# Altium PCB BatteryBoardPCB.PcbDoc
Units mil, origin at the board's own origin, x right, y up, seen from the top; angles counter-clockwise.
Board outline 3543.88 x 3543.5 mil, 4 copper layers (Top Layer, GND, VCC, Bottom Layer), stack 68.756 mil thick; 52 components, 28 nets, 198 pads, 48 vias.
Unrouted connection lines stored in the file: 82.
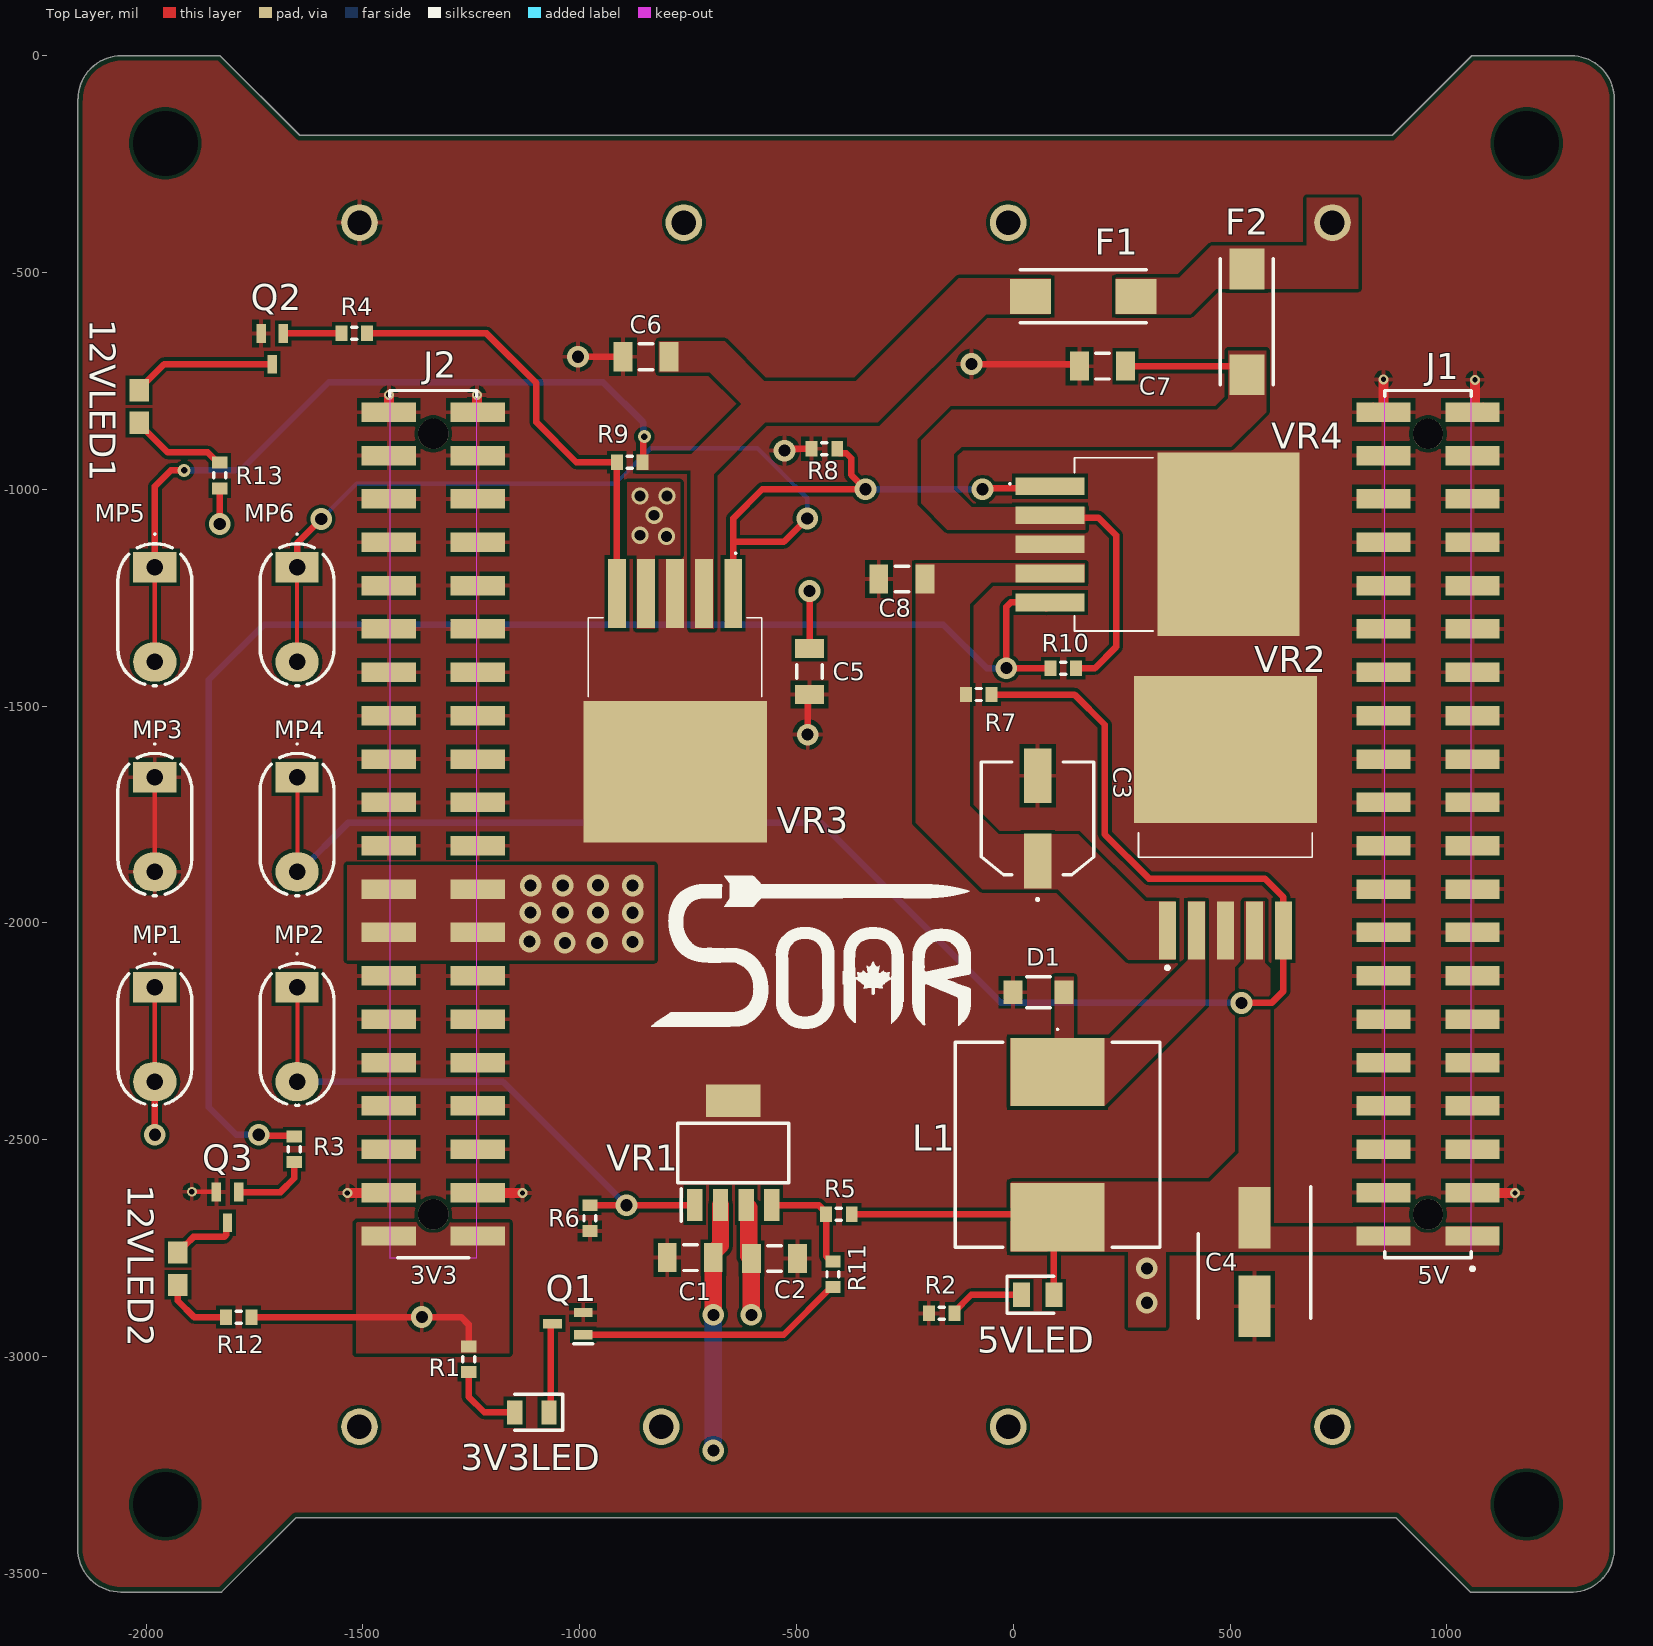
[diagram p0: Top Layer view]
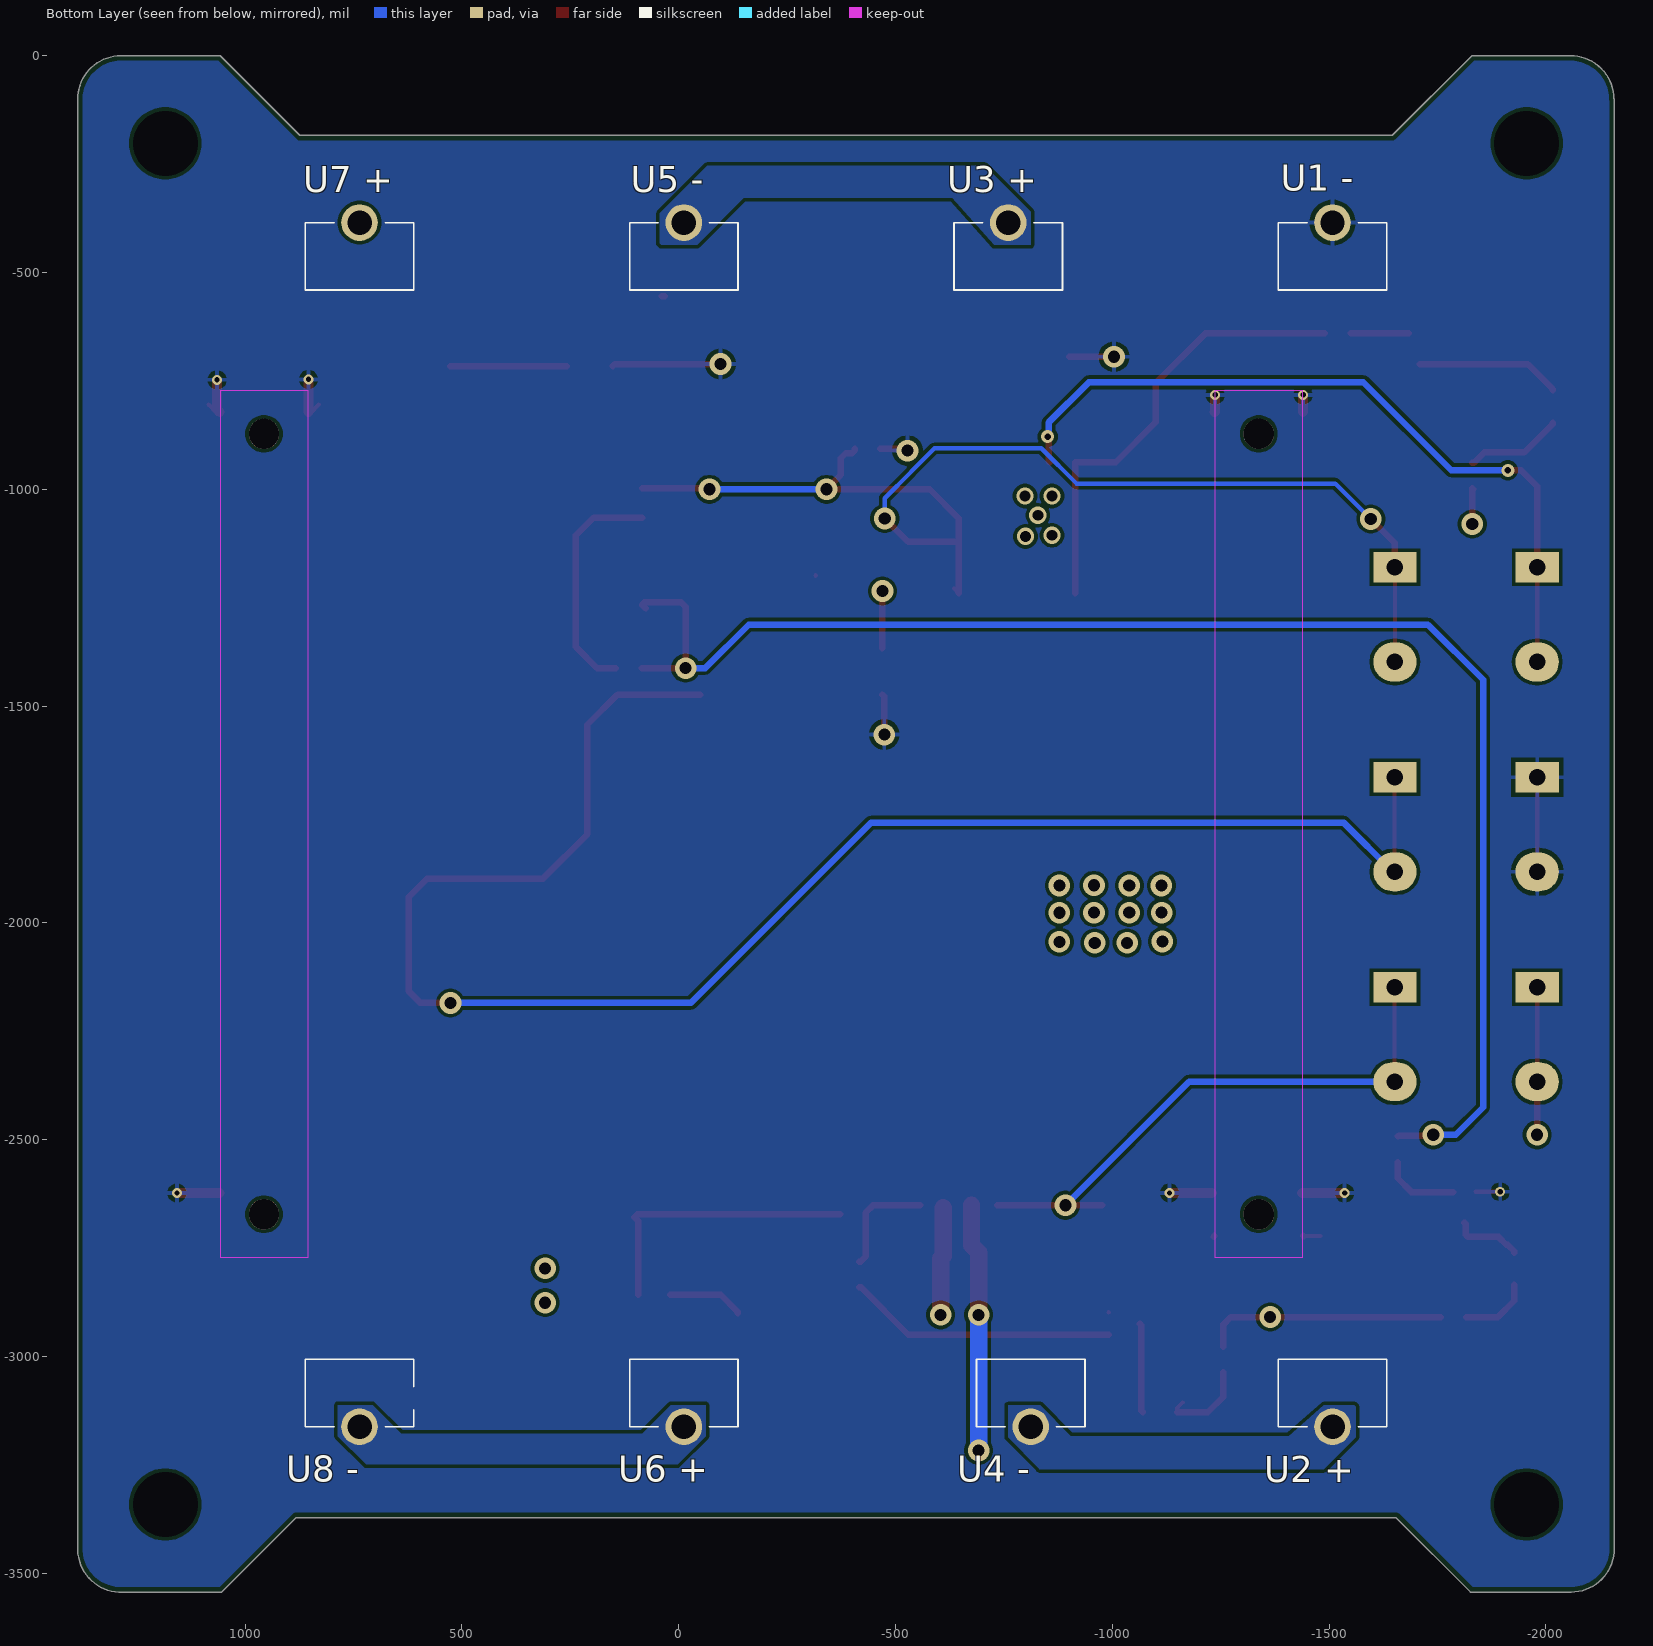
[diagram p1: Bottom Layer view, seen from below]
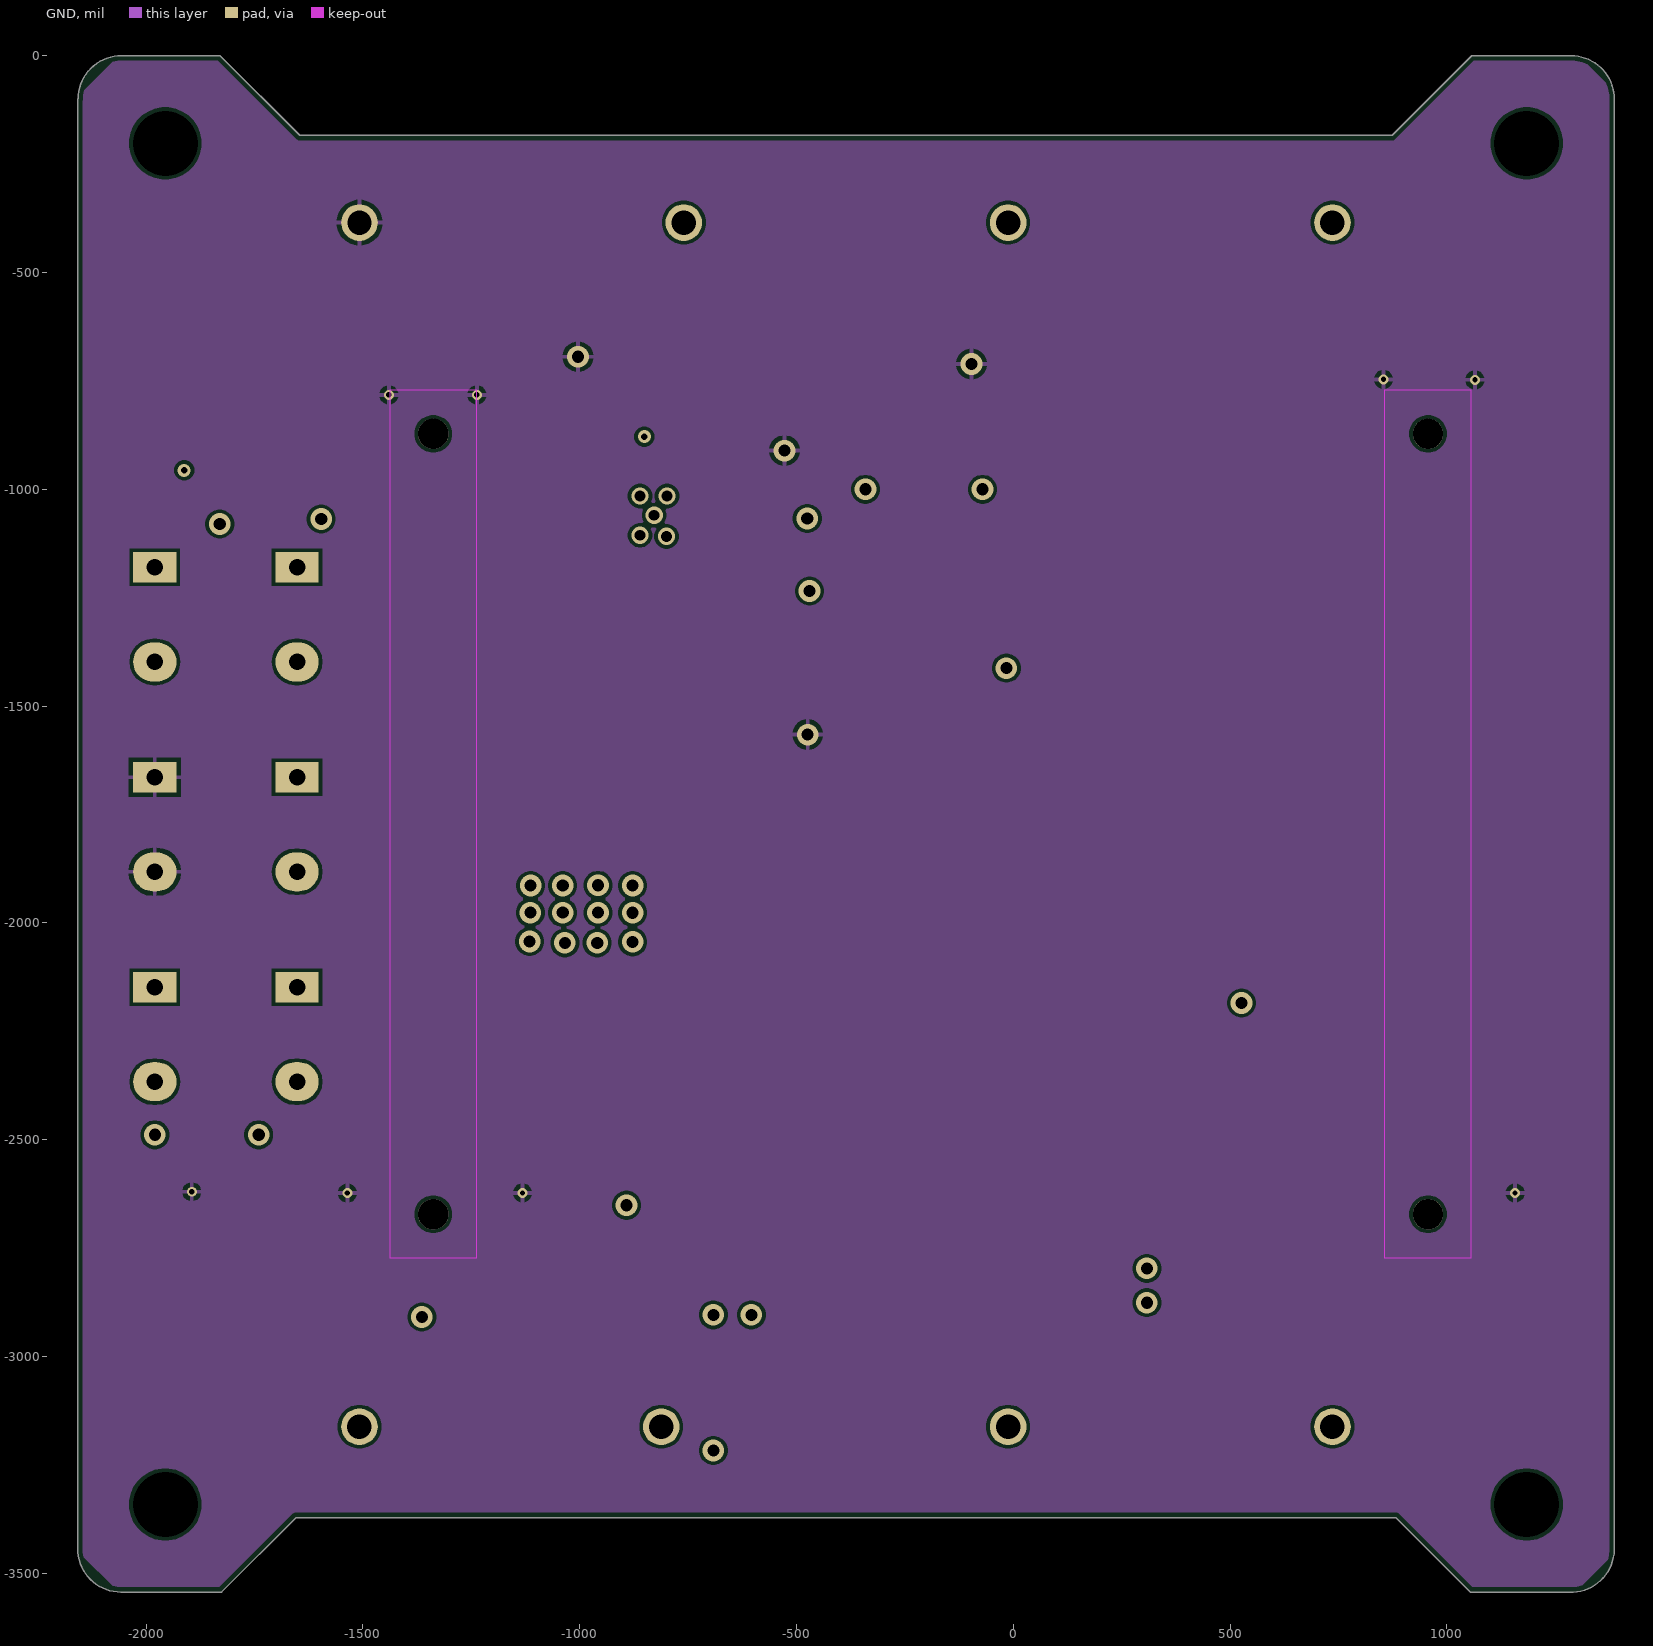
[diagram p2: GND]
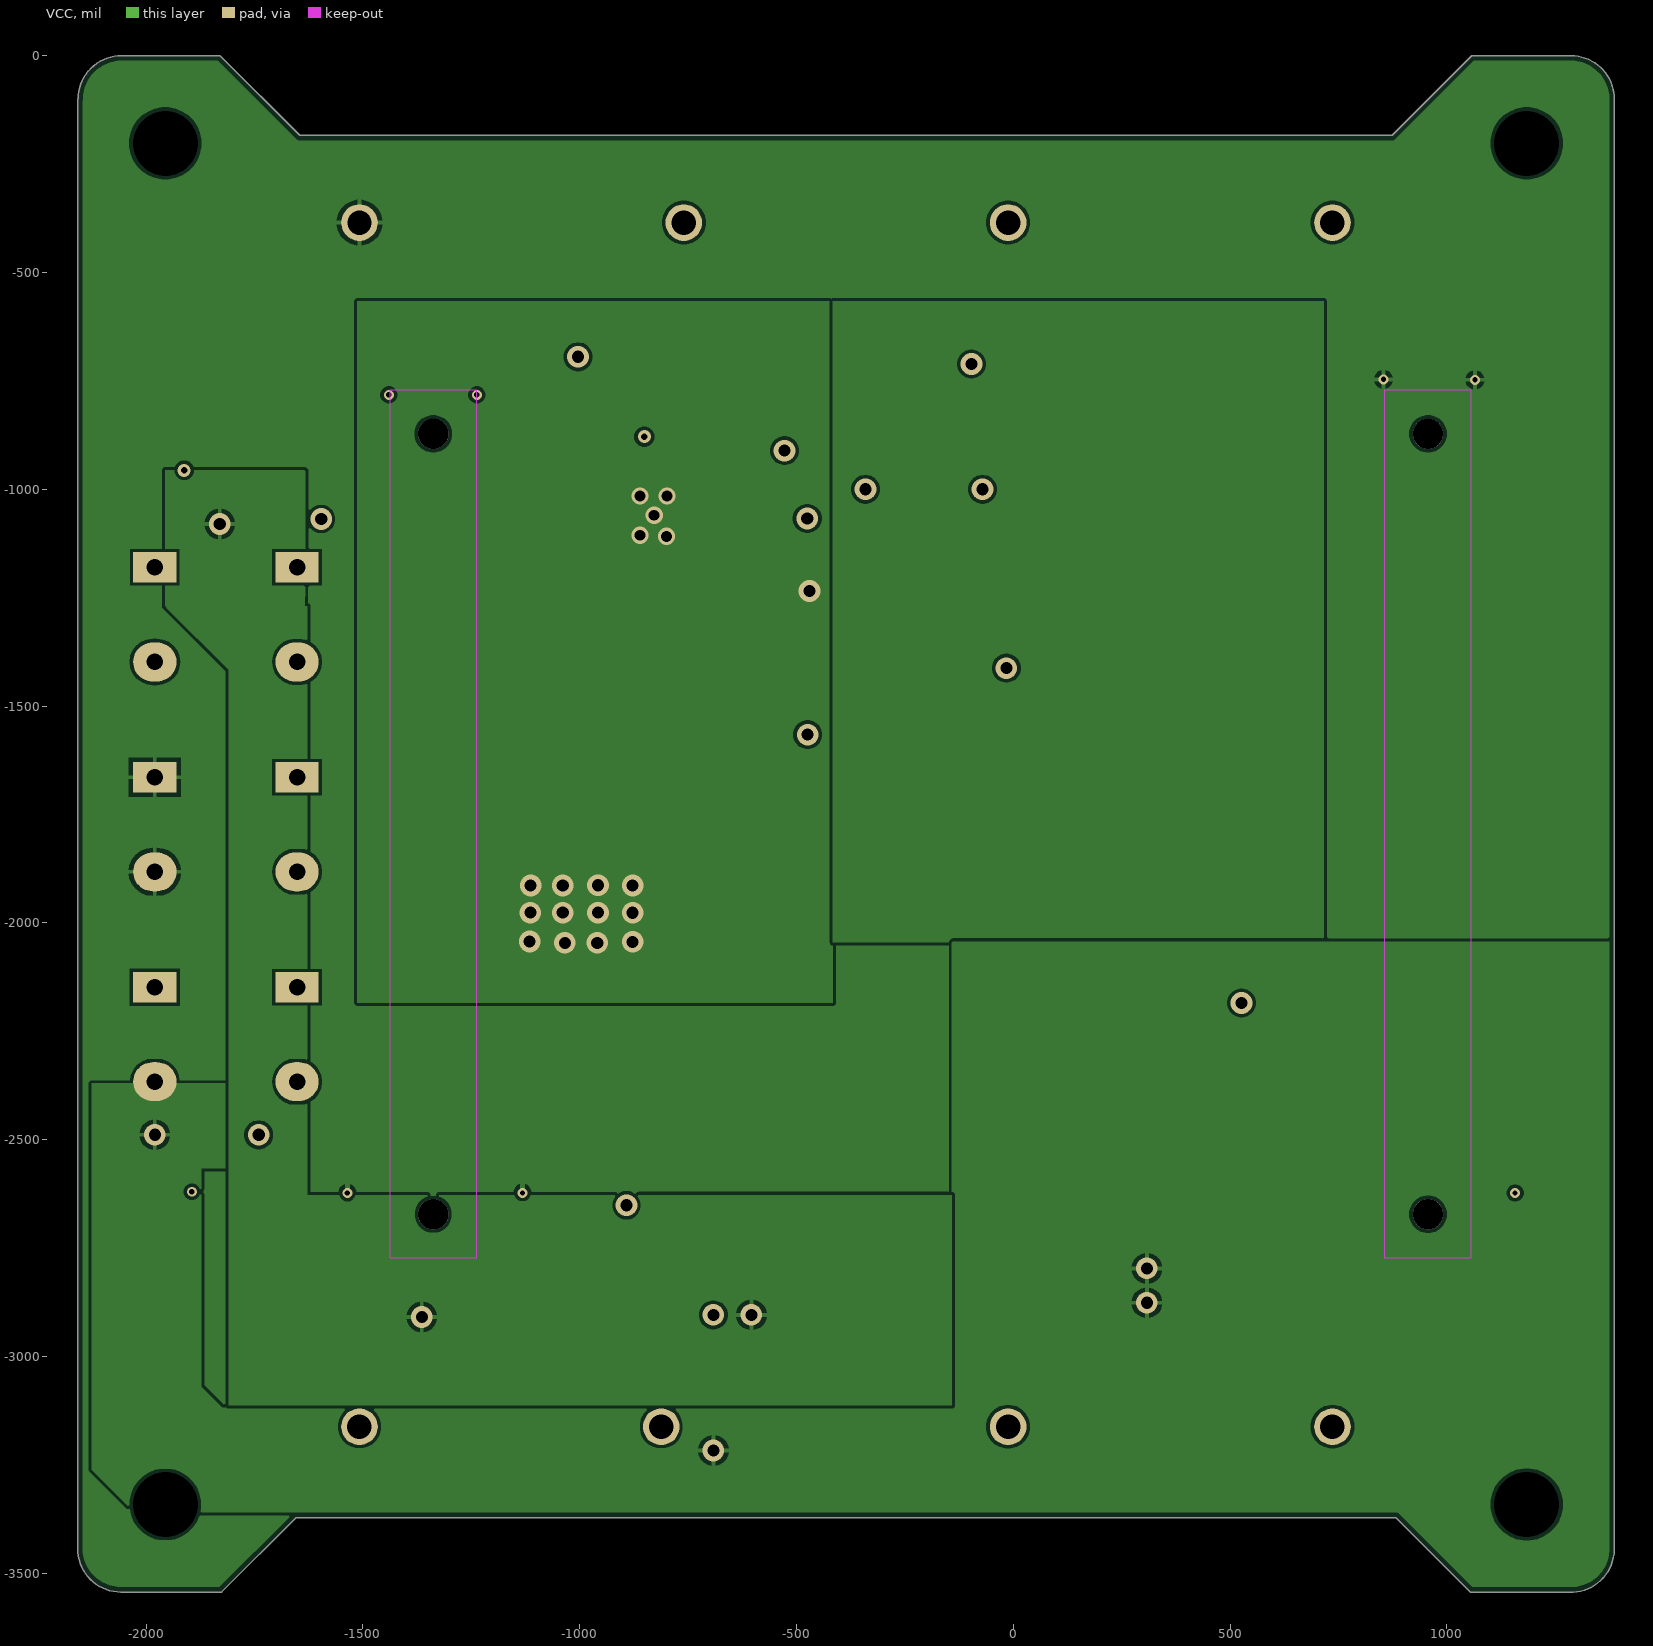
[diagram p3: VCC]

## Layer stack, top to bottom
Top Solder: solder mask 0.5, Solder Resist, Dk 3.3
Top Layer: signal copper 0.7
Dielectric 1: prepreg 2.8, PP-006, Dk 4.1
GND: signal copper 1.378
Dielectric1: core 59, FR-4, Dk 4.3
VCC: signal copper 1.378
Dielectric 2: prepreg 2.8, PP-006, Dk 4.1
Bottom Layer: signal copper 0.7
Bottom Solder: solder mask 0.5, Solder Resist, Dk 3.3

## Board outline
1386.02,-3438.34 cw(c1286.15,-3443.51) 1291.33,-3543.37 1054.01,-3543.37 882.01,-3371.37 -1653.99,-3371.37 -1825.99,-3543.37 -2058.37,-3543.37 -2058.37,-3543.32 cw(c-2057.85,-3443.33) -2157.85,-3442.8 -2157.85,-99.35 -2156.97,-99.35 cw(c-2056.97,-99.88) -2056.45,0.12 -2056.45,0 -1830.17,0 -1828.23,-1.13 -1645.99,-183.37 874.01,-183.37 1057.38,0 1286.18,0 1286.3,0.12 cw(c1286.03,-99.88) 1386.03,-100.14 1386.03,-2826.36

## Design rules (kind name [scope] priority, off if disabled: settings)
BoardOutlineClearance [All] p1: gap=11.81 ignorepadtopadclearanceinfootprint=FALSE except(15.75: Arc-SplitBarrior Arc-SplitContinuation Track-SplitBarrior Track-SplitContinuation SMDPad-SplitBarrior SMDPad-SplitContinuation THPad-SplitBarrior THPad-SplitContinuation Via-SplitBarrior Via-SplitContinuation Fill-SplitBarrior Fill-SplitContinuation Poly-SplitBarrior Poly-SplitContinuation Region-SplitBarrior Region-SplitContinuation Text-SplitBarrior Text-SplitContinuation)
Clearance "Clearance Different Nets" [All] p1: gap=7.87 ignorepadtopadclearanceinfootprint=FALSE except(3.5: Arc-Arc Arc-Track Arc-SMDPad Track-Track Track-SMDPad; 5: SMDPad-SMDPad SMDPad-Via THPad-Via Via-Via; 10: Arc-Via Arc-Text Track-Via Track-Text SMDPad-Text THPad-Text Via-Text Fill-Text Poly-Text Region-Text Text-Text; 19.68: THPad-THPad Via-Hole)
Clearance "Clearance Same Nets" [All] p2: gap=7.87 ignorepadtopadclearanceinfootprint=FALSE except(3.5: Arc-Arc Arc-Track Arc-SMDPad Track-Track Track-SMDPad SMDPad-SMDPad; 5: SMDPad-Via THPad-Via; 10: Arc-Via Arc-Text Track-Via Track-Text SMDPad-Text THPad-Text Via-Via Via-Text Fill-Text Poly-Text Region-Text Text-Text)
Clearance "Clearance Bottom Layer" [OnLayer('Bottom Layer')] p3: gap=8 ignorepadtopadclearanceinfootprint=TRUE except(10: Arc-Text Track-Text SMDPad-Text THPad-Text Via-Text Fill-Text Poly-Text Region-Text Text-Text)
Clearance "Clearance Top Layer" [OnLayer('Top Layer')] p4: gap=8 ignorepadtopadclearanceinfootprint=TRUE except(10: Arc-Text Track-Text SMDPad-Text THPad-Text Via-Text Fill-Text Poly-Text Region-Text Text-Text)
HoleSize [All] p1: absolutevalues=TRUE maxlimit=248.03 minlimit=7.87 maxpercent=80.000 minpercent=20.000
MinimumAnnularRing [All] p1: minimumring=5.12
MinimumSolderMaskSliver [All] p1: minsoldermaskwidth=3.94
PlaneClearance [All] p1: clearance=15
PolygonConnect PolygonConnect_14 [All vs IsNamedPolygon('5V_L01_P100')] p1: thpad.connectstyle=Relief thpad.reliefconductorwidth=10 thpad.reliefentries=4 thpad.polygonreliefangle="90 Angle" thpad.airgapwidth=10 smdpad.connectstyle=Relief smdpad.reliefconductorwidth=10 smdpad.reliefentries=4 smdpad.polygonreliefangle="90 Angle" smdpad.airgapwidth=10 via.connectstyle=Direct via.reliefconductorwidth=10 via.reliefentries=4 via.polygonreliefangle="90 Angle" via.airgapwidth=10
PolygonConnect PolygonConnect_13 [All vs IsNamedPolygon('12V1_L03_P066')] p2: thpad.connectstyle=Relief thpad.reliefconductorwidth=10 thpad.reliefentries=4 thpad.polygonreliefangle="90 Angle" thpad.airgapwidth=10 smdpad.connectstyle=Relief smdpad.reliefconductorwidth=10 smdpad.reliefentries=4 smdpad.polygonreliefangle="90 Angle" smdpad.airgapwidth=10 via.connectstyle=Direct via.reliefconductorwidth=10 via.reliefentries=4 via.polygonreliefangle="90 Angle" via.airgapwidth=10
PolygonConnect PolygonConnect_12 [All vs IsNamedPolygon('12V1_L01_P099')] p3: connectstyle=Direct reliefconductorwidth=10 reliefentries=4 polygonreliefangle="90 Angle" airgapwidth=10
PolygonConnect PolygonConnect_11 [All vs IsNamedPolygon('12V1_L01_P098')] p4: connectstyle=Direct reliefconductorwidth=10 reliefentries=4 polygonreliefangle="90 Angle" airgapwidth=10
PolygonConnect PolygonConnect_10 [All vs IsNamedPolygon('12V1_L01_P095')] p5: thpad.connectstyle=Direct thpad.reliefconductorwidth=10 thpad.reliefentries=4 thpad.polygonreliefangle="90 Angle" thpad.airgapwidth=10 smdpad.connectstyle=Direct smdpad.reliefconductorwidth=10 smdpad.reliefentries=4 smdpad.polygonreliefangle="90 Angle" smdpad.airgapwidth=10 via.connectstyle=Relief via.reliefconductorwidth=10 via.reliefentries=4 via.polygonreliefangle="90 Angle" via.airgapwidth=10
PolygonConnect PolygonConnect_9 [All vs IsNamedPolygon('12V1_L01_P095')] p6: thpad.connectstyle=Direct thpad.reliefconductorwidth=10 thpad.reliefentries=4 thpad.polygonreliefangle="90 Angle" thpad.airgapwidth=10 smdpad.connectstyle=Direct smdpad.reliefconductorwidth=10 smdpad.reliefentries=4 smdpad.polygonreliefangle="90 Angle" smdpad.airgapwidth=10 via.connectstyle=Relief via.reliefconductorwidth=10 via.reliefentries=4 via.polygonreliefangle="90 Angle" via.airgapwidth=10
PolygonConnect PolygonConnect_8 [All vs IsNamedPolygon('12V1_L01_P097')] p7: thpad.connectstyle=Direct thpad.reliefconductorwidth=10 thpad.reliefentries=4 thpad.polygonreliefangle="90 Angle" thpad.airgapwidth=10 smdpad.connectstyle=Direct smdpad.reliefconductorwidth=10 smdpad.reliefentries=4 smdpad.polygonreliefangle="90 Angle" smdpad.airgapwidth=10 via.connectstyle=Relief via.reliefconductorwidth=10 via.reliefentries=4 via.polygonreliefangle="90 Angle" via.airgapwidth=10
PolygonConnect PolygonConnect_7 [All vs IsNamedPolygon('12V1_L01_P095')] p8: thpad.connectstyle=Direct thpad.reliefconductorwidth=10 thpad.reliefentries=4 thpad.polygonreliefangle="90 Angle" thpad.airgapwidth=10 smdpad.connectstyle=Relief smdpad.reliefconductorwidth=10 smdpad.reliefentries=4 smdpad.polygonreliefangle="90 Angle" smdpad.airgapwidth=10 via.connectstyle=Relief via.reliefconductorwidth=10 via.reliefentries=4 via.polygonreliefangle="90 Angle" via.airgapwidth=10
PolygonConnect PolygonConnect_6 [All vs IsNamedPolygon('12V1_L01_P097')] p9: connectstyle=Relief reliefconductorwidth=10 reliefentries=4 polygonreliefangle="90 Angle" airgapwidth=10
PolygonConnect PolygonConnect_5 [All vs IsNamedPolygon('12V1_L01_P097')] p10: thpad.connectstyle=Direct thpad.reliefconductorwidth=10 thpad.reliefentries=4 thpad.polygonreliefangle="90 Angle" thpad.airgapwidth=10 smdpad.connectstyle=Relief smdpad.reliefconductorwidth=10 smdpad.reliefentries=4 smdpad.polygonreliefangle="90 Angle" smdpad.airgapwidth=10 via.connectstyle=Relief via.reliefconductorwidth=10 via.reliefentries=4 via.polygonreliefangle="90 Angle" via.airgapwidth=10
PolygonConnect PolygonConnect_4 [All vs IsNamedPolygon('12V1_L01_P095')] p11: thpad.connectstyle=Direct thpad.reliefconductorwidth=10 thpad.reliefentries=4 thpad.polygonreliefangle="90 Angle" thpad.airgapwidth=10 smdpad.connectstyle=Relief smdpad.reliefconductorwidth=10 smdpad.reliefentries=4 smdpad.polygonreliefangle="90 Angle" smdpad.airgapwidth=10 via.connectstyle=Relief via.reliefconductorwidth=10 via.reliefentries=4 via.polygonreliefangle="90 Angle" via.airgapwidth=10
PolygonConnect PolygonConnect_3 [All vs IsNamedPolygon('12V2_L01_P081')] p12: thpad.connectstyle=Relief thpad.reliefconductorwidth=10 thpad.reliefentries=4 thpad.polygonreliefangle="90 Angle" thpad.airgapwidth=10 smdpad.connectstyle=Direct smdpad.reliefconductorwidth=10 smdpad.reliefentries=4 smdpad.polygonreliefangle="90 Angle" smdpad.airgapwidth=10 via.connectstyle=Relief via.reliefconductorwidth=10 via.reliefentries=4 via.polygonreliefangle="90 Angle" via.airgapwidth=10
PolygonConnect PolygonConnect_2 [All vs IsNamedPolygon('12V2_L01_P081')] p13: connectstyle=Relief reliefconductorwidth=10 reliefentries=4 polygonreliefangle="90 Angle" airgapwidth=10
PolygonConnect PolygonConnect_1 [(InComponent('VR1') OR InComponent('VR2') OR InComponent('VR3') OR InComponent('VR4'))] p14: thpad.connectstyle=Relief thpad.reliefconductorwidth=10 thpad.reliefentries=4 thpad.polygonreliefangle="90 Angle" thpad.airgapwidth=10 smdpad.connectstyle=Direct smdpad.reliefconductorwidth=10 smdpad.reliefentries=4 smdpad.polygonreliefangle="90 Angle" smdpad.airgapwidth=10 via.connectstyle=Relief via.reliefconductorwidth=10 via.reliefentries=4 via.polygonreliefangle="90 Angle" via.airgapwidth=10
PolygonConnect "All Polygons" [(InNet('VBAT') OR InNet('3V3') OR InNet('5V') OR InNet('12V1') OR InNet('12V2') OR InNet('NetC6_1') OR InNet('NetC7_1') OR InNet('NetD1_1') OR InNet('NetD1_1') OR InNet('NetU3_1') OR InNet('NetU2_1') OR InNet('NetU6_1'))] p15: thpad.connectstyle=Direct thpad.reliefconductorwidth=10 thpad.reliefentries=4 thpad.polygonreliefangle="90 Angle" thpad.airgapwidth=10 smdpad.connectstyle=Direct smdpad.reliefconductorwidth=10 smdpad.reliefentries=4 smdpad.polygonreliefangle="90 Angle" smdpad.airgapwidth=10 via.connectstyle=Relief via.reliefconductorwidth=10 via.reliefentries=4 via.polygonreliefangle="90 Angle" via.airgapwidth=10 // Direct Connect
PolygonConnect [All] p16: connectstyle=Relief reliefconductorwidth=10 reliefentries=4 polygonreliefangle="90 Angle" airgapwidth=10
RoutingCorners [All] p1: cornerstyle=Round minsetback=100 maxsetback=100
RoutingVias [All] p1: holewidth=19.68 width=39.37 viastyle="Through Hole" minholewidth=7.87 minwidth=13.78 maxholewidth=39.37 maxwidth=78.74
SilkToSilkClearance [All] p1: silktosilkclearance=3.94
SilkToSolderMaskClearance [IsPad] p1: minsilkscreentomaskgap=3.94 clearancetoexposedcopper=TRUE
SolderMaskExpansion [All] p1: expansion=4 istentingtop=FALSE
Width [All] p1: maxlimit=100 minlimit=3.5 preferedwidth=15
24 further rules are at their usual default settings.

## Classes and differential pairs
component class BatteryBoard: 3V3LED 5VLED 12VLED1 12VLED2 + - C1 C2 C3 C4 C5 C6 C7 C8 D1 F1 F2 J1 L1 MP1 MP2 MP3 MP4 MP5 MP6 Q1 Q2 Q3 R1 R2 R3 R4 R5 R6 R7 R8 R9 R10 R11 R12 R13 "U1 -" "U2 +" "U3 +" "U4 -" "U5 -" "U6 +" VR1 VR2

## Components (designator, comment, footprint, x,y, rotation, side; value= is the part's Value field where it differs from the comment)
3V3LED "APTD2012LZGCK" LEDC2012X105N -1110.17,-3128.72 r180 top
5VLED "APTD2012LQBC_D" LEDC2012X120N 56.3,-2857.66 r0 top
12VLED1 "APTD2012LSURCK" LEDM2012X120N -2016,-809 r270 top
12VLED2 "APTD2012LSURCK" LEDM2012X120N -1926.96,-2797.59 r270 top
C1 "Cap Semi" C1206 -745,-2772 r0 top value=10uF
C2 "Cap Semi" C1206 -551.01,-2774.05 r180 top value=10uF
C3 "100uF" EEEHP1H4R7P 56,-1758.83 r0 top
C4 "330uF" CAPAE660X800N 556.17,-2781.84 r270 top
C5 "Cap Semi" C1206 -469.98,-1420 r90 top value=10uF
C6 "Cap Semi" C1206 -847.18,-694.18 r180 top value=0.1uF
C7 "Cap Semi" C1206 205.52,-716 r180 top value=0.1uF
C8 "Cap Semi" C1206 -257.04,-1206.43 r0 top value=10uF
D1 "SBR3U40S1F-7" SODFL3518X115N 58.01,-2160 r180 top
F1 "3404.0014.11" FUSM7431X260N 161.28,-555.01 r180 top
F2 "3404.0014.11" FUSM7431X260N 538.59,-613.64 r270 top
J1 "HW-20-16-F-D-250-SM-A" SAMTEC_HW-20-16-F-D-250-SM-A 1059,-2722 r90 top
J2 "HW-20-16-F-D-250-SM-A" SAMTEC_HW-20-16-F-D-250-SM-A -1235.37,-2722 r90 top
L1 "MSS1278H-334KED" MSS1278H334KED 102,-2511.36 r0 top
MP1 "7466310" 7466310 -1980,-2148 r270 top
MP2 "7466310" 7466310 -1652,-2148 r270 top
MP3 "7466310" 7466310 -1980,-1664 r270 top
MP4 "7466310" 7466310 -1652,-1664 r270 top
MP5 "7466310" 7466310 -1980,-1180 r270 top
MP6 "7466310" 7466310 -1652,-1180 r270 top
Q1 "2SC4213BTE85LF" SOT65P210X110-3N -1027.43,-2924.05 r180 top
Q2 "2SC4213BTE85LF" SOT65P210X110-3N -1709.26,-675.79 r270 top
Q3 "2SC4213BTE85LF" SOT65P210X110-3N -1812.4,-2656.04 r270 top
R1 "Res3" J1-0603 -1256.32,-3006.43 r90 top value=47
R2 "Res3" J1-0603 -165.39,-2900.6 r180 top value=220
R3 "Res3" J1-0603 -1658.6,-2522 r270 top value=10k
R4 "Res3" J1-0603 -1520,-640.35 r180 top value=10k
R5 "Res3" J1-0603 -402.22,-2672 r0 top value=10K
R6 "Res3" J1-0603 -976.41,-2680.65 r90 top value=10K
R7 "Res3" J1-0603 -79.68,-1473.15 r0 top value=10K
R8 "Res3" J1-0603 -435.58,-906.34 r180 top value=10K
R9 "Res3" J1-0603 -885.03,-937.52 r0 top value=10K
R10 "Res3" J1-0603 115.06,-1412.39 r0 top value=10K
R11 "Res3" J1-0603 -416,-2810.41 r270 top value=10k
R12 "Res3" J1-0603 -1786.81,-2909.04 r0 top value=100
R13 "Res3" J1-0603 -1830.28,-968 r270 top value=100
"U1 -" "1017-1" 10171 -1508.06,-384.8 r0 bottom (schematic designator U1)
"U2 +" "1017-1" 10171 -1508.07,-3161.95 r180 bottom (schematic designator U2)
"U3 +" "1017-1" 10171 -760.03,-384.8 r0 bottom (schematic designator U3)
"U4 -" "1017-1" 10171 -812.04,-3161.95 r180 bottom (schematic designator U4)
"U5 -" "1017-1" 10171 -12,-384.8 r0 bottom (schematic designator U5)
"U6 +" "1017-1" 10171 -12,-3161.95 r180 bottom (schematic designator U6)
"U7 +" "1017-1" 10171 736.03,-384.8 r0 bottom (schematic designator U7)
"U8 -" "1017-1" 10171 736.03,-3161.95 r180 bottom (schematic designator U8)
VR1 "LP3852EMP-3.3_NOPB" SOT150P700X180-5N -645.82,-2530.54 r90 top
VR2 "TL2575-05IKTTR" TL1963AQKTTRQ1 489.24,-1802.23 r0 top
VR3 "MIC29301-12WU" MIC2930133WUTR -780.17,-1651.29 r180 top
VR4 "MIC29301-12WU" MIC2930133WUTR 496,-1126.79 r270 top

## Footprints (in the part's own frame and the unit in brackets; to place one, negate y for a bottom-side part, rotate by r counter-clockwise, add the part's x,y. Pads: shape width x height; smd on the part's side, far side on the other; paste and mask are expansions set on the pad)
10171 [mm]
  round 2.145 hole 1.43: 1(0,0)
  silkscreen extent -3.17,0 3.17,3.95, body extent -3.17,-0.61 3.17,3.95, height 13.94
7466310 [mm]
  rect 1.778x2.54 hole 0.97: 1(0,0)
  oval 2.286x2.54 hole 0.97: 2(5.54,0)
  silkscreen extent -2,-2.16 6.94,2.16, body extent -1.38,-2.16 6.92,2.16, height 7.1
C1206 [mm] "Chip Capacitor, Body 3.2x1.6mm, IPC High Density"
  rect 1.1x1.7 smd: 1(-1.35,0) 2(1.35,0)
  silkscreen extent -0.4,-0.75 0.4,0.75, body extent -1.7,-0.9 1.7,0.9, height 1.3
CAPAE660X800N [mm]
  rect 3.6x1.85 smd: 1(-2.6,0) 2(2.6,0)
  silkscreen extent -4.4,-3.3 3.3,3.3, body extent -3.7,-3.4 3.7,3.4, height 8
EEEHP1H4R7P [mm]
  rect 1.6x3.2 smd: 1(0,-2.5) 2(0,2.5)
  silkscreen extent -3.3,-4.8 3.3,3.3, body extent -3.3,-3.65 3.3,3.65, height 7.7
FUSM7431X260N [mm]
  rect 2.4x2.05 smd: 1(-3.1,0) 2(3.1,0)
  silkscreen extent -3.7,-1.55 3.7,1.55
J1-0603 [mm] "Chip Resistor, Body 1.6x0.8mm, IPC High Density"
  rect 0.7x0.9 smd: 1(-0.75,0) 2(0.75,0)
  silkscreen extent -0.15,-0.35 0.15,0.35, body extent -0.85,-0.48 0.85,0.48, height 0.9
LEDC2012X105N [mm]
  rect 0.9x1.4 smd: 1(-1,0) 2(1,0)
  silkscreen extent -1.8,-1.05 1,1.05, body extent -1.03,-0.63 0.97,0.63, height 1.05
LEDC2012X120N [mm]
  rect 1x1.45 smd: 1(-0.95,0) 2(0.95,0)
  silkscreen extent -1.8,-1.07 0.95,1.07, body extent -1,-0.64 1,0.62, height 0.99
LEDM2012X120N [mm]
  rect 1.3x1.15 smd: 1(-0.95,0) 2(0.95,0)
  body extent -1,-0.63 1,0.63, height 1.05
MIC2930133WUTR [mil]
  rect 40.98x158.98 smd: 1(-134.02,-411.5) 2(-67.01,-411.5) 3(0,-411.5) 4(67.01,-411.5) 5(134.02,-411.5)
  rect 422.99x327.01 smd: 6(0,0)
  silkscreen extent -200,-506 200,-173, body extent -200,-355 200,0, height 204
MSS1278H334KED [mm]
  rect 5.5x4 smd: 1(0,4.25) 2(0,-4.25)
  silkscreen extent -6,-6 6,6.8, body extent -6,-6 6,6, height 8.15
SAMTEC_HW-20-16-F-D-250-SM-A [mm]
  rect 1.14x3.175 smd: 01(0,0) 02(0,5.205) 03(2.54,0) 04(2.54,5.205) 05(5.08,0) 06(5.08,5.205) 07(7.62,0) 08(7.62,5.205) 09(10.16,0) 10(10.16,5.205) 11(12.7,0) 12(12.7,5.205) 13(15.24,0) 14(15.24,5.205) 15(17.78,0) 16(17.78,5.205) 17(20.32,0) 18(20.32,5.205) 19(22.86,0) 20(22.86,5.205) 21(25.4,0) 22(25.4,5.205) 23(27.94,0) 24(27.94,5.205) 25(30.48,0) 26(30.48,5.205) 27(33.02,0) 28(33.02,5.205) 29(35.56,0) 30(35.56,5.205) 31(38.1,0) 32(38.1,5.205) 33(40.64,0) 34(40.64,5.205) 35(43.18,0) 36(43.18,5.205) 37(45.72,0) 38(45.72,5.205) 39(48.26,0) 40(48.26,5.205)
  round 1.78 hole 1.78 unplated mask+0.076: ""(1.27,2.603) ""(46.99,2.603)
  silkscreen extent -2.02,-0.1 49.53,5.14
SODFL3518X115N [mm]
  rect 1.12x1.37 smd: 1(-1.5,0) 2(1.5,0)
  silkscreen extent -0.69,-0.9 0.69,0.9, body extent -1.75,-0.9 1.75,0.9, height 1.15
SOT65P210X110-3N [mm]
  rect 1.1x0.55 smd: 1(-0.9,0.65) 2(-0.9,-0.65) 3(0.9,0)
  silkscreen extent -1.45,1.17 -0.35,1.17
SOT150P700X180-5N [mm]
  rect 1.9x0.9 smd: 1(-3.05,2.25) 2(-3.05,0.75) 3(-3.05,-0.75) 4(-3.05,-2.25)
  rect 1.9x3.2 smd: 5(3.05,0)
  silkscreen extent -4,-3.25 1.75,3.25, body extent -3.48,-3.25 3.48,3.25, height 1.68
TL1963AQKTTRQ1 [mm]
  rect 1x3.4 smd: 1(-3.4,-5.47) 2(-1.7,-5.47) 3(0,-5.47) 4(1.7,-5.47) 5(3.4,-5.47)
  rect 10.7x8.6 smd: 6(0,5.13)
  silkscreen extent -5.09,-7.75 5.09,0.25, body extent -5.08,-6.79 5.08,8.48, height 4.59

## Part data
3V3LED: "LED", Manufacturer_Name=Kingbright, Mouser Part Number=604-APTD2012LZGCK, Arrow Part Number=APTD2012LZGCK, Arrow Price/Stock=https://www.arrow.com/en/products/aptd2012lzgck/kingbright?region=nac, Datasheet Link=http://www.kingbrightusa.com/images/catalog/SPEC/APTD2012LZGCK.pdf, Height=1.05mm, Manufacturer_Part_Number=APTD2012LZGCK, Mouser Price/Stock=https://www.mouser.co.uk/ProductDetail/Kingbright/APTD2012LZGCK?qs=AQlKX63v8RvUnlqpSGhMeA%3D%3D
5VLED: "LED", Arrow Part Number=APTD2012LQBC/D, Manufacturer_Name=Kingbright, Mouser Part Number=604-APTD2012LQBCD, Arrow Price/Stock=https://www.arrow.com/en/products/aptd2012lqbcd/kingbright?region=nac, Datasheet Link=https://componentsearchengine.com/Datasheets/1/APTD2012LQBC_D.pdf, Height=1.2mm, Manufacturer_Part_Number=APTD2012LQBC/D, Mouser Price/Stock=https://www.mouser.co.uk/ProductDetail/Kingbright/APTD2012LQBC-D?qs=AQlKX63v8RvDGqprk6aUCg%3D%3D
12VLED1 12VLED2: "LED", Manufacturer_Name=Kingbright, Mouser Part Number=604-APTD2012LSURCK, Arrow Part Number=APTD2012LSURCK, Arrow Price/Stock=https://www.arrow.com/en/products/aptd2012lsurck/kingbright?region=nac, Datasheet Link=http://www.kingbrightusa.com/images/catalog/SPEC/APTD2012LSURCK.pdf, Height=1.2mm, Manufacturer_Part_Number=APTD2012LSURCK, Mouser Price/Stock=https://www.mouser.co.uk/ProductDetail/Kingbright/APTD2012LSURCK?qs=AQlKX63v8RvkMadNvwbkxw%3D%3D
C1 C2 C5 C6 C7 C8: "Capacitor (Semiconductor SIM Model)", LatestRevisionDate=29-May-2009, LatestRevisionNote="IPC-7351 Footprint Added.", PackageDescription="Chip Capacitor", PackageReference=C1206, Published=8-Jun-2000, Publisher="Altium Limited"
C3: library part EEE-FPE101XAL, "Capacitor Polarised", Manufacturer_Name=Panasonic, Mouser Part Number=667-EEE-FPE101XAL, Arrow Part Number=EEE-FPE101XAL, Arrow Price/Stock=https://www.arrow.com/en/products/eee-fpe101xal/panasonic?region=nac, Datasheet Link=http://industrial.panasonic.com/cdbs/www-data/pdf/RDE0000/RDE0000C1272.pdf, Manufacturer_Part_Number=EEE-FPE101XAL, Mouser Price/Stock=https://www.mouser.co.uk/ProductDetail/Panasonic/EEE-FPE101xAL?qs=vmHwEFxEFR%2FU1ayQL%252BhZlg%3D%3D
C4: library part EMZR160ARA331MF80G, "Capacitor Polarised", Manufacturer_Name=Chemi-Con, Mouser Part Number=661-EMZR160ARA331MF8, Arrow Part Number=EMZR160ARA331MF80G, Arrow Price/Stock=https://www.arrow.com/en/products/emzr160ara331mf80g/united-chemi-con, Datasheet Link=https://datasheet.datasheetarchive.com/originals/distributors/DKDS-39/4980.pdf, Height=8mm, Manufacturer_Part_Number=EMZR160ARA331MF80G, Mouser Price/Stock=https://www.mouser.co.uk/ProductDetail/United-Chemi-Con/EMZR160ARA331MF80G?qs=y6ZabgHbY%252BxNFfWWRjsyvw%3D%3D
D1: "Diode", Manufacturer_Name="Diodes Incorporated", Mouser Part Number=621-SBR3U40S1F-7, Arrow Part Number=SBR3U40S1F-7, Arrow Price/Stock=https://www.arrow.com/en/products/sbr3u40s1f-7/diodes-incorporated, Datasheet Link=https://www.arrow.com/en/products/sbr3u40s1f-7/diodes-incorporated, Height=1.15mm, Manufacturer_Part_Number=SBR3U40S1F-7, Mouser Price/Stock=https://www.mouser.co.uk/ProductDetail/Diodes-Incorporated/SBR3U40S1F-7?qs=HXFqYaX1Q2yP2B8FJNWOhg%3D%3D
F1 F2: "Fuse", Manufacturer_Name=SCHURTER, Mouser Part Number=693-3404.0014.11, Arrow Part Number=3404.0014.11, Arrow Price/Stock=https://www.arrow.com/en/products/3404.0014.11/schurter?region=europe, Datasheet Link=https://www.schurter.sg/en/datasheet/typ_OMF_125.pdf, Height=2.6mm, Manufacturer_Part_Number=3404.0014.11, Mouser Price/Stock=https://www.mouser.co.uk/ProductDetail/Schurter/3404001411?qs=8QfiMw8FY5MW%252BuaV2dEayA%3D%3D
J1 J2: Package=None, Availability=Unavailable, MP=HW-20-16-F-D-250-SM-A, Price=None
L1: "Inductor", Manufacturer_Name=COILCRAFT, Mouser Part Number=994-MSS1278H-334KED, Datasheet Link=https://4donline.ihs.com/images/VipMasterIC/IC/COLC/COLC-S-A0010155479/COLC-S-A0010155479-1.pdf?hkey=EF798316E3902B6ED9A73243A3159BB0, Height=8.05mm, Manufacturer_Part_Number=MSS1278H-334KED, Mouser Price/Stock=https://www.mouser.co.uk/ProductDetail/Coilcraft/MSS1278H-334KED?qs=KUoIvG%2F9IlYsPneJA3QIdw%3D%3D
MP1 MP2 MP3 MP4 MP5 MP6: "Terminals WP-SMRA SMD w/Pins 5.5mm", Manufacturer_Name="Wurth Elektronik", Mouser Part Number=710-7466310, Datasheet Link=https://www.we-online.com/catalog/datasheet/7466310.pdf, Geometry.Height=7mm, Manufacturer_Part_Number=7466310, Mouser Price/Stock=https://www.mouser.co.uk/ProductDetail/Wurth-Elektronik/7466310?qs=HXFqYaX1Q2wJWeDTYvGsCg%3D%3D
Q1 Q2 Q3: "Transistor BJT NPN", Manufacturer_Name=Toshiba, Mouser Part Number=757-2SC4213BTE85LF, Datasheet Link=http://toshiba.semicon-storage.com/info/docget.jsp?did=19305&prodName=2SC4213, Height=1.1mm, Manufacturer_Part_Number=2SC4213BTE85LF, Mouser Price/Stock=https://www.mouser.co.uk/ProductDetail/Toshiba/2SC4213BTE85LF?qs=3kEcuH7qFhdqHZKOo23uyA%3D%3D
R1 R2 R3 R4 R5 R6 R7 R8 R9 R10 R11 R12 R13: "Resistor", LatestRevisionDate=29-May-2009, LatestRevisionNote="IPC-7351 Footprint Added.", PackageDescription="Chip Resistor", PackageReference=J1-0603, Published=8-Jun-2000, Publisher="Altium Limited"
"U1 -" "U2 +" "U3 +" "U4 -" "U5 -" "U6 +" "U7 +" "U8 -": "Undefined or Miscellaneous", Manufacturer_Name="Keystone Electronics", Mouser Part Number=534-1017-1, Datasheet Link=https://componentsearchengine.com/Datasheets/1/1017-1.pdf, Height=13.84mm, Manufacturer_Part_Number=1017-1, Mouser Price/Stock=https://www.mouser.co.uk/ProductDetail/Keystone-Electronics/1017-1?qs=wOxb8XianXhq6%252BfB2t0c2Q%3D%3D
VR1: "Integrated Circuit", Arrow Part Number=LP3852EMP-3.3/NOPB, Manufacturer_Name="Texas Instruments", Mouser Part Number=926-LP3852EMP33NOPB, Arrow Price/Stock=https://www.arrow.com/en/products/lp3852emp-3.3nopb/texas-instruments, Datasheet Link=http://www.ti.com/lit/ds/symlink/lp3852.pdf, Height=1.8mm, Manufacturer_Part_Number=LP3852EMP-3.3/NOPB, Mouser Price/Stock=https://www.mouser.co.uk/ProductDetail/Texas-Instruments/LP3852EMP-33-NOPB?qs=1FNqv8aZn1SurWe7DNzDPA%3D%3D
VR2: "Integrated Circuit", Manufacturer_Name="Texas Instruments", Mouser Part Number=595-TL2575-05IKTTR, Arrow Part Number=TL2575-05IKTTR, Arrow Price/Stock=https://www.arrow.com/en/products/tl2575-05ikttr/texas-instruments?region=nac, Datasheet Link=http://www.ti.com/lit/gpn/tl2575-05, Height=4mm, Manufacturer_Part_Number=TL2575-05IKTTR, Mouser Price/Stock=https://www.mouser.co.uk/ProductDetail/Texas-Instruments/TL2575-05IKTTR?qs=EnLMdcWnKADvl92kjFJdog%3D%3D
VR3 VR4: library part MIC29301-3.3WU-TR, "Integrated Circuit", Manufacturer_Name=Microchip, Mouser Part Number=998-MIC29301-3.3WUTR, Arrow Part Number=MIC29301-3.3WU-TR, Arrow Price/Stock=https://www.arrow.com/en/products/mic29301-3.3wu-tr/microchip-technology, Datasheet Link=http://www.microchip.com/mymicrochip/filehandler.aspx?ddocname=en580805, Height=5.08mm, Manufacturer_Part_Number=MIC29301-3.3WU-TR, Mouser Price/Stock=https://www.mouser.co.uk/ProductDetail/Microchip-Technology/MIC29301-3.3WU-TR?qs=U6T8BxXiZAWJme4uExHM0Q%3D%3D

## Free pads (board coordinates)
  round 60 hole 150 unplated mask+10: 9(1184.02,-202) 10(-1955.85,-202) 11(-1955.85,-3341.26) 12(1184.02,-3341.26)

## Via types
v1: diameter 50, hole 28, Top Layer to Bottom Layer, 33 vias
v2: diameter 23, hole 12, Top Layer to Bottom Layer, 8 vias
v3: diameter 40, hole 25, Top Layer to Bottom Layer, 5 vias
v4: diameter 30, hole 15, Top Layer to Bottom Layer, 2 vias

## Nets (pads, with @x,y where several pads share a name; then routed paths per layer and width w, separated by ;. In a path a pad name is that pad's centre, name@x,y a point inside that pad or via, vN(x,y) a via of type N, cw(c..) or ccw(c..) an arc to the next point about the centre after c; other vN are vias at no path point)
3V3: C2.2 J2.01 J2.02 R1.2 R12.2 R13.2 VR1.3 | length 946.5
  Top Layer w10: J2.02@-1480.35,-2722 J2.02
  Top Layer w15: R13.2@-1832.17,-999.42 R13.2 v1(-1830.28,-1080) ; R12.2 v1(-1364.2,-2909.04) -1273.18,-2909.04 -1256.32,-2925.9 R1.2 ; J2.02@-1441.26,-2722.97 J2.02 ; J2.01 J2.01@-1234.05,-2723.32 ; VR1.3 VR1.3@-610.22,-2656.68 ; C2.2@-610.22,-2767.98 C2.2
  Top Layer w40: C2.2@-610.22,-2767.98 VR1.3@-610.22,-2656.68 ; v1@-604.15,-2904.71 C2.2
  other v1: -604.15,-2903.92
5V: 5VLED.2 C1.2 C4.1 J1.01 J1.02 L1.2 MP1.1 MP1.2 R5.2 VR1.2 VR2.4 | length 1578.3
  Top Layer w10: MP1.2 MP1.1
  Top Layer w15: v1@-1980,-2488.51 MP1.2 ; R5.2 95.32,-2672 L1.2 93.71,-2686.97 5VLED.2
  Top Layer w40: v1(-691.85,-2903.85) C1.2 -691.85,-2760.19 -675.34,-2743.68 VR1.2
  Bottom Layer w15: MP1.2 MP1.2@-1975,-2366.11
  Bottom Layer w40: v1(-691.85,-2903.85) -691.85,-3028.89 -691.79,-3028.95 v1(-691.79,-3216.61)
  other v1: 307.99,-2875.84 307.99,-2796.79 -1980.02,-2488.54
12V1: C5.2 J2.15 J2.16 J2.17 J2.18 VR3.4 | length 132.4
  Top Layer w15: C5.2 v1(-469.98,-1234.44)
  other v1: -1034.3,-2045.99 -959.75,-2045.99 -878.04,-2043.72 -1115.64,-2042.73 -1113.84,-1976.22 -1039.3,-1976.22 -957.71,-1976.22 -878.04,-1976.4 -1113.17,-1913.78 -1039.3,-1913.78 -957.71,-1913.1 -878.04,-1913.78
  other v3: -800.07,-1108.55 -860.92,-1106.01 -828.35,-1059.81 -860.92,-1015.24 -798.74,-1015.47
12V2: C3.1 C8.2 R7.1 VR2.1 VR4.4
EN1: MP6.1 MP6.2 R8.1 VR3.1 VR4.1 | length 2934.1
  Top Layer w10: MP6.2 MP6.1 ; VR3.1 VR3.1@-635.03,-1228.67
  Top Layer w15: MP6.2 MP6.2@-1633.78,-1416.33 ; MP6.1 -1652,-1124.26 v1(-1596.26,-1068.52) ; VR3.1 -646.16,-1121.01 ; v1(-475.28,-1067.1) -529.18,-1121.01 -646.16,-1121.01 ; R8.1 -406.06,-910.28 -399.78,-916.56 -385.39,-916.56 -373.96,-927.99 -373.96,-966.8 v1(-340.97,-999.79) -578.84,-999.79 -646.16,-1067.1 -646.16,-1121.01 ; v1(-71.05,-999.79) -69.25,-997.98 VR4.1@84.5,-997.98
  Bottom Layer w10: v1(-1596.26,-1068.52) -1514.45,-986.7 -917.68,-986.7 -836.25,-905.27 -589.96,-905.27 -535.81,-959.41 -535.81,-959.87 -475.28,-1020.4 v1(-475.28,-1067.1) v1@-477.17,-1065.21
  Bottom Layer w15: v1(-340.97,-999.79) v1(-71.05,-999.79)
ERROR: R5.1 R11.1 VR1.4 | length 254.4
  Top Layer w15: VR1.4 -449.2,-2650.61 -431.75,-2668.06 R5.1 -431.75,-2769.08 -419.94,-2780.89 R11.1
FLG1: R4.1 R9.1 VR3.5 | length 1054.2
  Top Layer w15: R4.1 -1214.92,-640.35 -1100,-755.27 -1100,-845.32 -1007.8,-937.52 R9.1 -914.37,-937.71 -914.37,-1239.61 VR3.5
FLG2: R3.1 R10.1 VR4.5 | length 3505.9
  Top Layer w15: v1(-1740.37,-2488.54) -1738.4,-2490.5 -1660.57,-2490.5 R3.1 ; VR4.5@76.24,-1274.28 84.5,-1266.02 79.29,-1260.8 -5.98,-1260.8 -16,-1270.82 v1(-16,-1412.39) R10.1
  Bottom Layer w15: v1@-1740.39,-2488.51 -1792.16,-2488.51 -1855.39,-2425.28 -1855.39,-1439.33 -1728.06,-1312 -161.37,-1312 -60.98,-1412.39 v1(-16,-1412.39)
GND: "U1 -.1" C1.1 C2.1 C3.2 C4.2 C5.1 C6.2 C7.2 C8.1 D1.2 J1.03 J1.04 J1.05 J1.06 J1.07 J1.08 J1.09 J1.10 J1.11 J1.12 J1.13 J1.14 J1.15 J1.16 J1.17 J1.18 J1.19 J1.20 J1.21 J1.22 J1.23 J1.24 J1.25 J1.26 J1.27 J1.28 J1.29 J1.30 J1.31 J1.32 J1.33 J1.34 J1.35 J1.36 J1.37 J1.38 J1.39 J1.40 J2.03 J2.04 J2.05 J2.06 J2.07 J2.08 J2.09 J2.10 J2.11 J2.12 J2.13 J2.14 J2.19 J2.20 J2.21 J2.22 J2.23 J2.24 J2.25 J2.26 J2.27 J2.28 J2.29 J2.30 J2.31 J2.32 J2.33 J2.34 J2.35 J2.36 J2.37 J2.38 J2.39 J2.40 MP3.1 MP3.2 Q1.2 Q2.2 Q3.2 R2.2 R6.1 R8.2 VR1.5 VR2.3 VR2.6 VR3.3 VR3.6 VR4.3 VR4.6 | length 1374.5
  Top Layer w10: MP3.2 MP3.1 ; v2(-1894.76,-2620) Q3.2@-1837.99,-2620 ; Q1.2 Q1.2@-991.5,-2897.95 ; C8.1@-316.39,-1198 C8.1@-315.38,-1199.01 ; J1.40@829.98,-804.56 847.42,-822 J1.40@853.56,-822 ; J1.39@1066.56,-822 J1.39@1084,-804.56
  Top Layer w15: v1(-1004,-694.18) C6.2 ; v1(-527.57,-910.69) -523.22,-906.34 R8.2 ; v1(-474.31,-1565.69) -474.31,-1477.48 C5.1 ; v1(-96.52,-711) 147.37,-711 C7.2
  Top Layer w23: v2(-1536,-2623.21) -1535.57,-2622.78 J2.04@-1437.85,-2622.78 ; J2.40 v2(-1440.29,-782) ; v2(-1237.33,-782) -1237.33,-820.03 J2.39 ; J2.03@-1230.22,-2623.07 -1132.5,-2623.07 v2(-1132.07,-2622.64) ; J1.40@853.55,-822 853.55,-746.65 v2(853.92,-746.28) ; J1.39@1058.47,-822 1064.56,-815.92 v2(1064.56,-747.38) ; J1.03@1059.19,-2623.13 1156.91,-2623.13 v2(1157.34,-2622.7)
Net3V3LED_1: 3V3LED.1 Q1.3 | length 208.3
  Top Layer w15: 3V3LED.1 -1066.83,-3124.75 -1066.83,-2927.37 -1063.51,-2924.05 Q1.3
Net3V3LED_2: 3V3LED.2 R1.1 | length 206.6
  Top Layer w10: 3V3LED.2@-1162.5,-3106.16 -1162.26,-3106.16 -1149.54,-3118.88 3V3LED.2
  Top Layer w15: R1.1 -1256.32,-3092.88 -1220.48,-3128.72 3V3LED.2
Net5VLED_1: 5VLED.1 R2.1 | length 174.9
  Top Layer w15: R2.1 -135.86,-2896.66 -96.86,-2857.66 5VLED.1
Net12VLED1_1: 12VLED1.1 Q2.3 | length 333.5
  Top Layer w15: 12VLED1.1 -2016,-768.65 -1958.57,-711.22 Q2.3
Net12VLED1_2: 12VLED1.2 R13.1 | length 225.6
  Top Layer w15: 12VLED1.2 -2016,-849.35 -2001.09,-864.27 -1950.44,-914.91 -1857.78,-914.91 -1834.22,-938.47 R13.1
Net12VLED2_1: 12VLED2.1 Q3.3 | length 159.3
  Top Layer w15: 12VLED2.1 -1926.96,-2757.24 -1911.82,-2742.1 -1908.87,-2742.1 -1890.9,-2724.13 -1820.28,-2724.13 -1815.73,-2719.58 -1815.73,-2694.8 Q3.3
Net12VLED2_2: 12VLED2.2 R12.1 | length 162.7
  Top Layer w15: 12VLED2.2 -1926.96,-2871.58 -1889.5,-2909.04 R12.1
NetC6_1: C6.1 F1.2 MP5.1 MP5.2 R9.2 VR3.2 | length 1770.8
  Top Layer w10: MP5.2 MP5.1
  Top Layer w15: MP5.1 -1980,-993.17 -1942.83,-956 v4(-1912.17,-956) ; R9.2 -853.53,-935.55 -853.53,-880.81 v4(-851.16,-878.44) ; F1.2@32.34,-555.01 F1.2
  Bottom Layer w15: v4(-1912.17,-956) -1782,-956 -1579,-753 -946.21,-753 -853.21,-846 -853.21,-876.38 v4(-851.16,-878.44)
NetC7_1: C7.1 F2.2 R10.2 VR4.2 | length 807.5
  Top Layer w15: VR4.2@84.5,-1064.99 196.05,-1064.99 237.07,-1106.01 237.07,-1363.54 188.22,-1412.39 R10.2 ; C7.1 F2.2@526.34,-716
NetD1_1: D1.1 L1.1 VR2.2
NetQ1_1: Q1.1 R11.2 | length 621.4
  Top Layer w15: Q1.1 -529.64,-2949.64 -419.94,-2839.94 R11.2
NetQ2_1: Q2.1 R4.2 | length 134.1
  Top Layer w15: Q2.1 R4.2
NetQ3_1: Q3.1 R3.2 | length 178.8
  Top Layer w15: Q3.1 -1690.1,-2620.61 -1658.6,-2589.11 R3.2
NetU2_1: "U2 +.1" "U4 -.1"
NetU3_1: "U3 +.1" "U5 -.1"
NetU6_1: "U6 +.1" "U8 -.1"
ON/OFF: MP4.1 MP4.2 R7.2 VR2.5 | length 3974.3
  Top Layer w10: MP4.2@-1650.87,-1893.13 MP4.1@-1650.87,-1656
  Top Layer w15: R7.2 141,-1473.15 210.97,-1543.12 210.97,-1796 312.76,-1897.79 580,-1897.79 623.1,-1940.88 VR2.5 623.1,-2157.03 595.49,-2184.63 v1(526.36,-2184.63)
  Bottom Layer w15: MP4.2 -1647,-1882.11 -1533.46,-1768.57 -443.98,-1768.57 -27.92,-2184.63 v1(526.36,-2184.63)
SD: MP2.1 MP2.2 R6.2 VR1.1 | length 1370.1
  Top Layer w10: MP2.2 MP2.2@-1650.87,-2366.11 ; MP2.1@-1650.87,-2148 MP2.2@-1650.87,-2366.11 ; MP2.2@-1625.55,-2379.19 -1638.63,-2366.11 MP2.2@-1650.87,-2366.11
  Top Layer w15: R6.2 -734.9,-2651.12 VR1.1
  Bottom Layer w15: MP2.2 -1177.15,-2366.11 v1(-892.14,-2651.12)
VBAT: "U7 +.1" F1.1 F2.1 | length 0.1
  Top Layer w28: 736.03,-385.68 736.09,-385.68
pads on no net: J1. J2.

## Polygon pours and split planes (outlines as drawn)
GND on Top Layer "GND_L01_P103" (solid, pour order 103): 1386.02,-3438.34 cw(c1286.15,-3443.51) 1291.33,-3543.37 1054.01,-3543.37 882.01,-3371.37 -1653.99,-3371.37 -1825.99,-3543.37 -2058.37,-3543.37 -2058.37,-3543.32 cw(c-2057.85,-3443.33) -2157.85,-3442.8 -2157.85,-99.35 -2156.97,-99.35 cw(c-2056.97,-99.88) -2056.45,0.12 -2056.45,0 -1830.17,0 -1828.23,-1.13 -1645.99,-183.37 874.01,-183.37 1057.38,0 1286.18,0 1286.3,0.12 cw(c1286.03,-99.88) 1386.03,-100.14 1386.03,-2826.36
VBAT on Top Layer "VBAT_L01_P058" (solid, pour order 58): 676.98,-328 795.09,-328 795.09,-537.29 467.69,-537.29 408.98,-596 236,-596 236,-513.07 237.07,-512 382.86,-512 456.74,-438.11 676.98,-438.11
3V3 on Top Layer "3V3_L01_P091" (solid, pour order 91): -1515.99,-2689.93 -1515.99,-2992.57 -1163.05,-2992.57 -1163.05,-2691.46
5V on Top Layer "5V_L01_P100" (solid, pour order 100): 264.53,-2722 264.53,-2932 351.44,-2932 351.44,-2722
12V1 on Top Layer "12V1_L01_P099" (solid, pour order 99): -1536,-1866.44 -1536,-2086 -828.35,-2086 -828.35,-1866.44
12V1 on Top Layer "12V1_L01_P098" (solid, pour order 98): -868.21,-1322 -868.21,-1152.19 -890.64,-1152.19 -890.64,-984.12 -768.44,-984.12 -768.44,-1152.19 -826.7,-1152.19 -826.7,-1322
12V2 on Top Layer "12V2_L01_P081" (solid, pour order 81): 164.91,-1171 164.91,-1214.26 -49.32,-1214.26 -99.96,-1264.9 -99.96,-1730.21 -34.18,-1796 150.19,-1796 303.9,-1949.71 372.14,-1949.71 372.14,-2084.53 264.53,-2084.53 102,-1922 -71.74,-1922 -225.16,-1768.57 -225.16,-1171
NetD1_1 on Top Layer "NETD1_1_L01_P084" (solid, pour order 84): 402,-1950 442.71,-1950 442.99,-1949.71 442.99,-2189.98 210.97,-2422 -7.55,-2422 -7.55,-2265.66 222.17,-2265.66 402,-2085.83 402,-1951
5V on Top Layer "5V_L01_P086" (solid, pour order 86): -6.47,-2758.13 -6.37,-2758.22 593.12,-2758.22 593.12,-2104.97 580,-2091.85 580,-1949.71 534.1,-1949.71 533.02,-1950.79 533.02,-2091.71 519.69,-2105.04 519.69,-2596.95 -3.98,-2596.95 -7.55,-2600.52 -7.55,-2754.05
5V on Top Layer "5V_L01_P087" (solid, pour order 87): 449.96,-2599.43 526.36,-2523.03 526.36,-2601.07 451.54,-2601.07 449.91,-2599.43
5V on Top Layer "5V_L01_P088" (solid, pour order 88): 795.08,-2701.03 998.91,-2701.03 1000.09,-2699.85 1119.65,-2699.85 1119.65,-2758.22 593.12,-2758.22 593.12,-2701.03
NetD1_1 on Top Layer "NETD1_1_L01_P090" (solid, pour order 90): 95,-2124.57 95,-2285.85 139.25,-2285.85 139.25,-2124.57
NetC6_1 on Top Layer "NETC6_1_L01_P059" (solid, pour order 59): 84.5,-596 86.04,-594.46 86.04,-513.07 -125.92,-513.07 -363.03,-750.19 -574.18,-750.19 -744,-920.01 -744,-1322 -691.23,-1322 -691.23,-964.88 -572,-845.65 -312.55,-845.65 -62.9,-596 86.04,-596
NetC7_1 on Top Layer "NETC7_1_L01_P061" (solid, pour order 61): 582.96,-680 582.96,-821.65 502.8,-901.81 -119.25,-901.81 -137,-919.56 -137,-999.79 -95.57,-1041.22 165.55,-1041.22 165.55,-1092.99 -152,-1092.99 -212.8,-1032.18 -212.8,-887.23 -141.48,-815.92 469.52,-815.92 496,-789.44 496,-680 581.19,-680
NetC6_1 on Top Layer "NETC6_1_L01_P065" (solid, pour order 65): -817.68,-658.75 -665.97,-658.75 -569.45,-755.27 -622.14,-807.97 -700.49,-729.62 -817.68,-729.62
NetC6_1 on Top Layer "NETC6_1_L01_P067" (solid, pour order 67): -868.21,-918.82 -729.27,-918.82 -729.27,-956.22 -868.21,-956.22
GND on Bottom Layer "GND_L04_P104" (solid, pour order 104): 1386.02,-3438.34 cw(c1286.15,-3443.51) 1291.33,-3543.37 1054.01,-3543.37 882.01,-3371.37 -1653.99,-3371.37 -1825.99,-3543.37 -2058.37,-3543.37 -2058.37,-3543.32 cw(c-2057.85,-3443.33) -2157.85,-3442.8 -2157.85,-99.35 -2156.97,-99.35 cw(c-2056.97,-99.88) -2056.45,0.12 -2056.45,0 -1830.17,0 -1828.23,-1.13 -1645.99,-183.37 874.01,-183.37 1057.38,0 1286.18,0 1286.3,0.12 cw(c1286.03,-99.88) 1386.03,-100.14 1386.03,-2826.36
NetU6_1 on Bottom Layer "NETU6_1_L04_P102" (solid, pour order 102): -62.1,-3111.85 -62.1,-3184.22 2.68,-3249 721,-3249 786.12,-3183.88 786.12,-3111.85 706.15,-3111.85 639.81,-3178.19 84.31,-3178.19 17.97,-3111.85
NetU2_1 on Bottom Layer "NETU2_1_L04_P028" (solid, pour order 28): -759.85,-3186.26 -832,-3258.41 -832,-3260 -1488,-3260 -1561.54,-3186.46 -1561.54,-3112.52 -1488,-3112.93 -1407.17,-3184 -904.15,-3184 -833.59,-3112.52 -759.85,-3112.52
NetU3_1 on Bottom Layer "NETU3_1_L04_P002" (solid, pour order 2): 43.41,-363.43 -66.03,-253.94 -706.29,-253.94 -812,-359.66 -812,-436 -728,-436 -631.5,-328 -150.52,-328 -42.52,-436 43.85,-436
GND on VCC "GND_L03_P105" (solid, pour order 105): 1386.02,-3438.34 cw(c1286.15,-3443.51) 1291.33,-3543.37 1054.01,-3543.37 882.01,-3371.37 -1653.99,-3371.37 -1825.99,-3543.37 -2058.37,-3543.37 -2058.37,-3543.32 cw(c-2057.85,-3443.33) -2157.85,-3442.8 -2157.85,-99.35 -2156.97,-99.35 cw(c-2056.97,-99.88) -2056.45,0.12 -2056.45,0 -1830.17,0 -1828.23,-1.13 -1645.99,-183.37 874.01,-183.37 1057.38,0 1286.18,0 1286.3,0.12 cw(c1286.03,-99.88) 1386.03,-100.14 1386.03,-2826.36
3V3 on VCC "3V3_L03_P034" (solid, pour order 34): -141.45,-3112.93 -1810,-3112.93 -1810,-2627.64 -141.45,-2627.64
12V1 on VCC "12V1_L03_P066" (solid, pour order 66): -416,-566.65 -416,-2183.6 -1512.65,-2183.6 -1512.65,-566.65
12V2 on VCC "12V2_L03_P064" (solid, pour order 64): -416,-566.65 -416,-572.75 -416,-2044.68 716.02,-2044.68 716.02,-1472.98 716.02,-566.65
3V3 on VCC "3V3_L03_P101" (solid, pour order 101): -1810,-2627.64 -1810,-1416.35 -1956.35,-1270 -1628.35,-1270 -1628.35,-2627.64
3V3 on VCC "3V3_L03_P093" (solid, pour order 93): -1632.77,-956 -1633.78,-1270 -1956.35,-1270 -1956.35,-956.5 -1955.85,-956
5V on VCC "5V_L03_P092" (solid, pour order 92): -2125,-2370.32 -1817.4,-2370.32 -1817.4,-2565.32 -2125,-2565.32
5V on VCC "5V_L03_P094" (solid, pour order 94): -134.22,-3118.6 -134.22,-3359.33 -2027.24,-3359.33 -2125,-3261.57 -2125,-2540.7 -1872.97,-2540.7 -1872.97,-2605.56 -1872.97,-3070 -1824.37,-3118.6
5V on VCC "5V_L03_P053" (solid, pour order 53): 1388.58,-3436.24 cw(c1288.73,-3441.42) 1293.89,-3541.28 1056.57,-3541.28 884.57,-3369.28 -141.45,-3369.28 -141.45,-2042.73 1387.84,-2043.28 1388.59,-2824.27
5V on VCC "5V_L03_P017" (solid, pour order 17): 130.12,-2876.32 130.12,-2146.4 56,-2146.4 56,-2384.92 -88,-2384.92 -88,-2876.32
GND on GND "GND_L02_P032" (solid, pour order 32): -2063.2,0.11 -2063.1,0 -1829.36,0 -1645.99,-183.37 874.82,-183.37 1058.37,0.17 1302.94,0.17 1385.92,-82.8 1385.92,-3453.59 1296.14,-3543.37 1054.01,-3543.37 882.01,-3371.37 -1653.99,-3371.37 -1653.99,-3371.38 -1825.99,-3543.37 -2063.31,-3543.37 -2158.51,-3448.17 -2158.04,-3447.7 -2158.04,-90.29 -2153.6,-90.29

## Keep-outs
Keep-Out Layer:
  region: 1056.03,-772 855.99,-772 855.99,-2772 1056.03,-2772
  region: -1237.81,-772 -1437.85,-772 -1437.85,-2772 -1237.81,-2772

## Silkscreen, mask and mechanical layers (free items; w line width, h text height)
Top Overlay:
  drawing of 5 lines, arcs and shapes, not listed
  text "3V3" at -1391.09,-2831.94 h40
  text "5V" at 933,-2832 h40
Board:
  lines w10: -2157.85,-3442.8 ccw(c-2057.85,-3443.33) -2058.37,-3543.32 cw(c-2057.85,-3443.33) -2157.85,-3442.8 ; -2157.85,-3442.8 -2157.85,-99.35 -2157.85,-3442.8 ; -1825.99,-3543.37 -2058.37,-3543.37 -1825.99,-3543.37 ; -1825.99,-3543.37 -1653.99,-3371.37 ; -1825.99,-3543.37 -1653.99,-3371.37 ; -1653.99,-3371.37 882.01,-3371.37 ; -1653.99,-3371.37 882.01,-3371.37 ; -1645.99,-183.37 -1828.23,-1.13 -1645.99,-183.37 ; -1645.99,-183.37 874.01,-183.37 ; -1645.99,-183.37 874.01,-183.37 ; 874.01,-183.37 1057.38,0 ; 874.01,-183.37 1057.38,0 ; 882.01,-3371.37 1054.01,-3543.37 ; 882.01,-3371.37 1054.01,-3543.37 ; 1054.01,-3543.37 1291.33,-3543.37 ; 1054.01,-3543.37 1291.33,-3543.37 ; 1057.38,0 1286.18,0 1057.38,0 ; 1291.33,-3543.37 ccw(c1286.15,-3443.51) 1386.02,-3438.34 ; 1291.33,-3543.37 ccw(c1286.15,-3443.51) 1386.02,-3438.34 ; 1386.03,-3438.34 1386.03,-2826.36 ; 1386.03,-3438.34 1386.03,-2826.36 ; 1386.03,-2826.36 1386.03,-100.14 ; 1386.03,-2826.36 1386.03,-100.14 ; 1386.03,-100.14 ccw(c1286.03,-99.88) 1286.3,0.12 cw(c1286.03,-99.88) 1386.03,-100.14 ; -2156.97,-99.35 cw(c-2056.98,-99.88) -2056.45,0.12 ccw(c-2056.98,-99.88) -2156.97,-99.35 ; -2056.45,0 -1830.17,0 -2056.45,0